# Altium PCB PCB1.pcbdoc
Units mil, origin at the board's own origin, x right, y up, seen from the top; angles counter-clockwise.
Board outline 3712 x 3149.61 mil, 2 copper layers (Top Layer, Bottom Layer); 12 components, 24 nets, 90 pads, 86 vias.
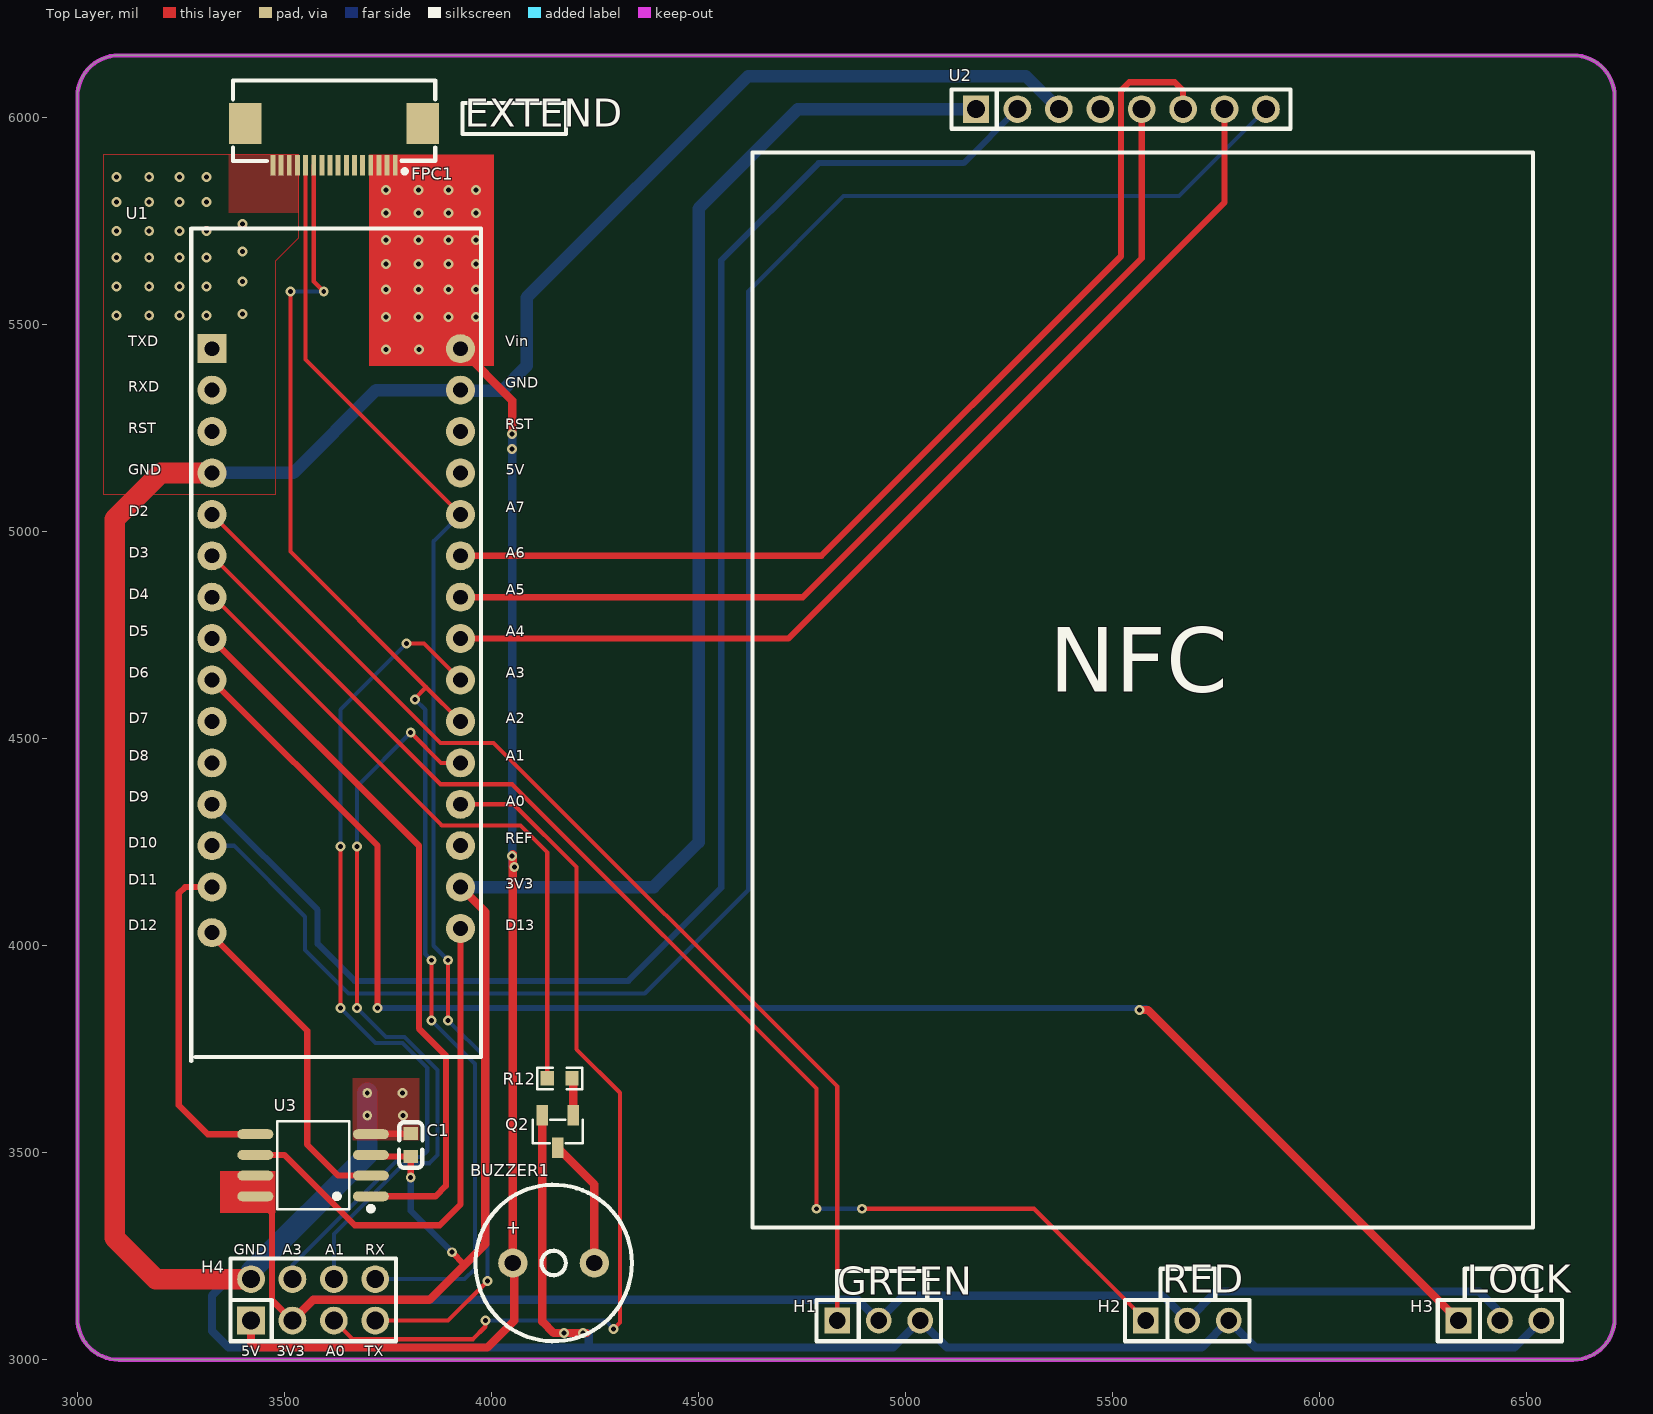
[diagram p0: Top Layer view]
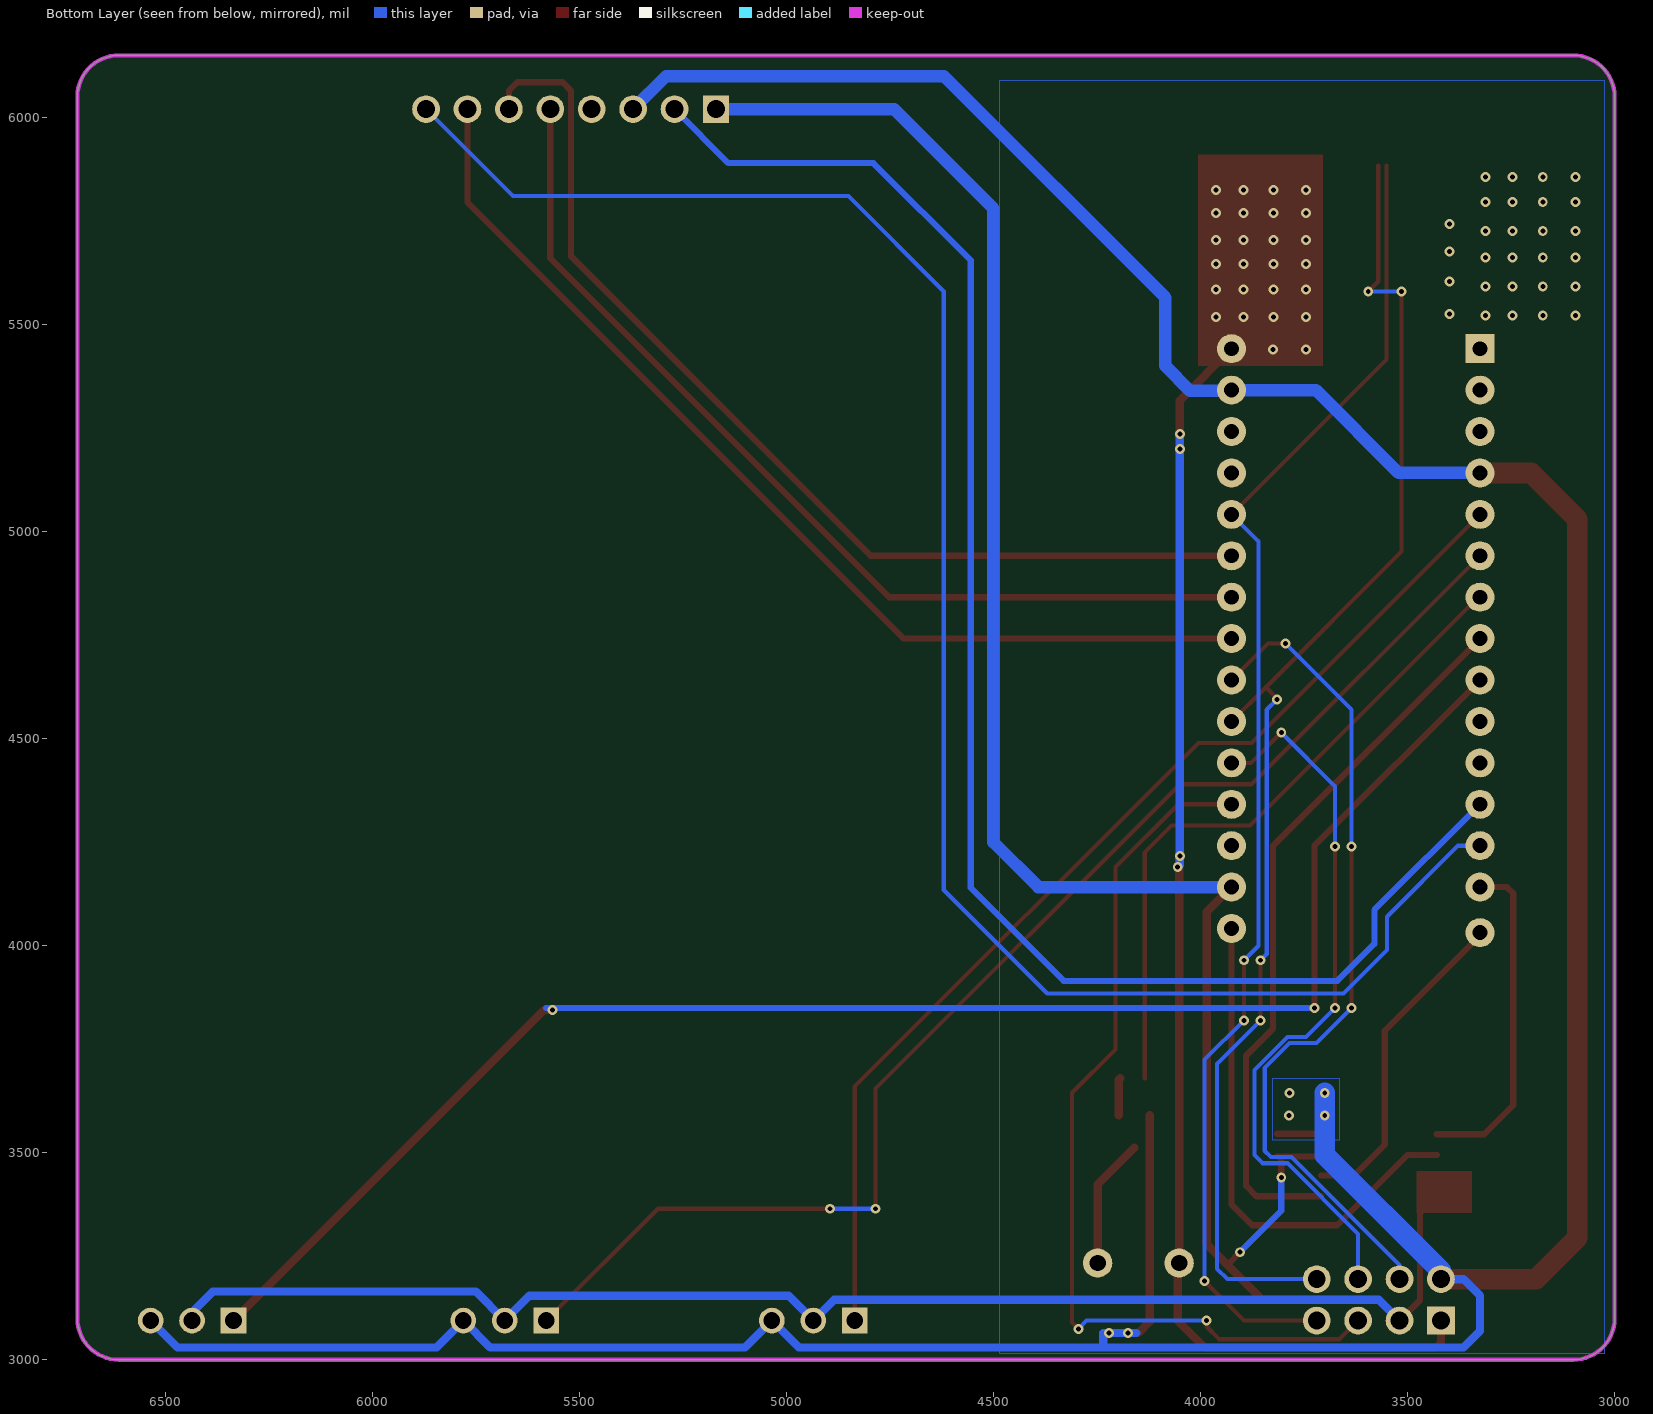
[diagram p1: Bottom Layer view, seen from below]

## Layer stack, top to bottom
Top Layer: signal copper (thickness not stored)
Dielectric: dielectric 12.6, FR-4, Dk 4.8
Bottom Layer: signal copper (thickness not stored)

## Board outline
3100,6149.61 6612,6149.61 cw(c6612,6049.61) 6712,6049.61 6712,3100 cw(c6612,3100) 6612,3000 3100,3000 cw(c3100,3100) 3000,3100 3000,6049.61 cw(c3100,6049.61)

## Components (designator, comment, footprint, x,y, rotation, side; value= is the part's Value field where it differs from the comment)
BUZZER1 "HNB09A05" BUZ-TH_BD9.6-P5.00-D0.7-FD 4150,3233.59 r0 top
C1 "CC0603KRX7R9BB104" C0603 3805,3518.23 r270 top
FPC1 "FPC-05F-16PH20" FPC-SMD_16P-P0.50_FPC-05F-16PH20 3620,5934.61 r180 top
H1 "PM254V-11-03-H85" HDR-TH_3P-P2.54-V-F 4935,3094.61 r0 top
H2 "PM254V-11-03-H85" HDR-TH_3P-P2.54-V-F 5680,3094.61 r0 top
H3 "PM254V-11-03-H85" HDR-TH_3P-P2.54-V-F 6435,3094.61 r0 top
H4 "PZ254V-12-8P" HDR-TH_8P-P2.54-V-M-R2-C4-S2.54 3569.39,3144.61 r0 top
Q2 "2N7002_C916396" SOT-23-3_L2.9-W1.3-P1.90-LS2.4-BR 4160,3551.06 r90 top
R12 "RC0603FR-071KL" R0603 4164.44,3679.61 r180 top
U1 "NUCLEO-L432KC" DIP-30_L51.0-W17.8-P2.54-LS15.2-TL 3625,4736.23 r0 top
U2 "PM254-1-08-Z-8.5" HDR-TH_8P-P2.54-V-F 5520,6019.61 r0 top
U3 "W25Q64JVSSIQ_C83140" SOP-8_L5.3-W5.3-P1.27-LS8.0-BL 3569.28,3469.61 r90 top

## Footprints (in the part's own frame and the unit in brackets; to place one, negate y for a bottom-side part, rotate by r counter-clockwise, add the part's x,y. Pads: shape width x height; smd on the part's side, far side on the other; paste and mask are expansions set on the pad)
BUZ-TH_BD9.6-P5.00-D0.7-FD [mm]
  round 1.8 hole 1: 1(-2.5,0) 2(2.5,0)
  silkscreen extent -4.8,-4.8 4.8,4.8
C0603 [mm]
  rect 0.8x0.9 smd: 1(-0.7,0) 2(0.7,0)
  silkscreen extent -1.41,-0.71 1.39,0.72
DIP-30_L51.0-W17.8-P2.54-LS15.2-TL [mil]
  rect 70x70 hole 36: 1(-300,705)
  round 70 hole 36: 2(-300,605) 3(-300,505) 4(-300,405) 5(-300,305) 6(-300,205) 7(-300,105) 8(-300,5) 9(-300,-95) 10(-300,-195) 11(-300,-295) 12(-300,-395) 13(-300,-495) 14(-300,-595) 15(-300,-705) 16(300,-695) 17(300,-595) 18(300,-495) 19(300,-395) 20(300,-295) 21(300,-195) 22(300,-95) 23(300,5) 24(300,105) 25(300,205) 26(300,305) 27(300,405) 28(300,505) 29(300,605) 30(300,705)
  silkscreen extent -350,-1015 350,995
FPC-SMD_16P-P0.50_FPC-05F-16PH20 [mm]
  rect 0.3x1.25 smd: 1(-3.75,1.288) 2(-3.25,1.288) 3(-2.75,1.288) 4(-2.25,1.288) 5(-1.75,1.288) 6(-1.25,1.288) 7(-0.75,1.288) 8(-0.25,1.288) 9(0.25,1.288) 10(0.75,1.288) 11(1.25,1.288) 12(1.75,1.288) 13(2.25,1.288) 14(2.75,1.288) 15(3.25,1.288) 16(3.75,1.288)
  rect 2x2.5 smd: 17(5.44,-1.288) 18(-5.44,-1.288)
  silkscreen extent -6.2,-3.91 6.2,1.78
HDR-TH_3P-P2.54-V-F [mil]
  rect 62x62 hole 40.16: 1(-100,0)
  round 62 hole 40.16: 2(0,0) 3(100,0)
  silkscreen extent -150,-50 150,50
HDR-TH_8P-P2.54-V-F [mm]
  rect 1.575x1.7 hole 1.1: 1(-8.89,0)
  round 1.7 hole 1.1: 2(-6.35,0) 3(-3.81,0) 4(-1.27,0) 5(1.27,0) 6(3.81,0) 7(6.35,0) 8(8.89,0)
  silkscreen extent -10.4,-1.2 10.4,1.2
HDR-TH_8P-P2.54-V-M-R2-C4-S2.54 [mm]
  rect 1.7x1.7 hole 1.1: 1(-3.81,-1.27)
  round 1.7 hole 1.1: 2(-3.81,1.27) 3(-1.27,-1.27) 4(-1.27,1.27) 5(1.27,-1.27) 6(1.27,1.27) 7(3.81,-1.27) 8(3.81,1.27)
  silkscreen extent -5.08,-2.54 5.08,2.54
R0603 [mil]
  rect 31.75x34.02 smd: 1(-29.66,0) 2(29.66,0)
  silkscreen extent -55,-26 55,26
SOP-8_L5.3-W5.3-P1.27-LS8.0-BL [mil]
  oval 23.98x86.79 smd: 1(-75,-139.46) 2(-25,-139.46) 3(25,-139.46) 4(75,-139.46) 5(75,139.46) 6(25,139.46) 7(-25,139.46) 8(-75,139.46)
  silkscreen extent -111,-145 106,87
SOT-23-3_L2.9-W1.3-P1.90-LS2.4-BR [mm]
  rect 1.25x0.7 smd: 1(1,-0.95) 2(1,0.95) 3(-1,0)
  silkscreen extent -0.73,-1.53 0.73,1.53

## Via types
v1: diameter 24.02, hole 12.01, Top Layer to Bottom Layer, 86 vias

## Nets (pads, with @x,y where several pads share a name; then routed paths per layer and width w, separated by ;. In a path a pad name is that pad's centre, name@x,y a point inside that pad or via, vN(x,y) a via of type N, cw(c..) or ccw(c..) an arc to the next point about the centre after c; other vN are vias at no path point)
3V3: C1.2 H1.2 H2.2 H3.2 H4.3 U1.17 U2.1 U3.3 U3.7 U3.8 | length 8185.2
  Top Layer w15: U3.8 3470,3354.43 3470,3144 H4.3 ; U3.3 3712.68,3490.67 C1.2 ; v1(3805,3439.61) C1.2 ; C1.2@3815,3490.67 C1.2 ; v1(3905,3259.61) 3933.51,3231.1 3933.51,3228.12
  Top Layer w20: H4.3 3569.39,3144.61 3850,3144.61 3933.51,3228.12 3985,3279.61 3985,4081.23 U1.17
  Bottom Layer w15: v1(3805,3439.61) 3805,3359.61 v1(3905,3259.61)
  Bottom Layer w20: H4.3 3569.39,3144.61 4885,3144.61 H1.2 4995,3154.61 5620,3154.61 H2.2 5750,3164.61 6385,3164.61 6435,3114.61 H3.2
  Bottom Layer w30: U1.17 4391.62,4141.23 4500,4249.61 4500,5779.61 4740,6019.61 U2.1
$1N1345: Q2.1 R12.1 | length 90.5
  Top Layer w20: R12.1 4197.4,3676.31 Q2.1
$1N1348: BUZZER1.2 Q2.3 | length 314.7
  Top Layer w20: Q2.3 4248.43,3423.26 BUZZER1.2
+5V: BUZZER1.1 FPC1.1 FPC1.2 FPC1.3 FPC1.4 H4.1 U1.30 | length 3154.8
  Top Layer w20: H4.1 3419.39,3040.22 3430,3029.61 3990,3029.61 4055,3094.61 4055,3230.16 BUZZER1.1 v1@4051.57,4221.19 ; U1.30 4050,5316.23 v1(4050,5235.42)
  Bottom Layer w20: v1(4050,5235.42) v1(4050,5199.61) v1(4050,4216.77) 4050,4194.61 v1(4055,4189.61)
  other v1: 3745,5439.61 3825.33,5439.61 3745,5518.22 3823.57,5518.22 3896.44,5518.22 3962.28,5518.22 3745,5584.06 3823.57,5584.06 3896.44,5584.06 3962.28,5584.06 3745,5645.52 3823.57,5645.52 3896.44,5645.52 3962.28,5645.52 3745,5703.46 3823.57,5703.46 3896.44,5703.46 3962.28,5703.46 3745,5768.42 3823.57,5768.42 3896.44,5768.42 3962.28,5768.42 3745,5824.61 3823.57,5824.61 3896.44,5824.61 3962.28,5824.61
A0: H4.5 U1.19 | length 2237.5
  Top Layer w10: H4.5 3664.39,3049.61 3955,3049.61 3985,3079.61 v1(3985,3094.61) ; U1.19 4053.38,4341.23 4205,4189.61 4205,3749.61 4310,3644.61 4310,3089.61 v1(4295,3074.61)
  Bottom Layer w10: v1(3985,3094.61) 4275,3094.61 v1(4295,3074.61)
A1: H4.6 U1.20 | length 1770.3
  Top Layer w10: v1(3675,3849.61) v1(3675,4239.61) ; v1(3805,4514.61) 3878.38,4441.23 U1.20
  Bottom Layer w10: H4.6 3619.39,3304 3790,3474.61 3850,3474.61 3870,3494.61 3870,3699.61 3790,3779.61 3745,3779.61 v1(3675,3849.61) ; v1(3675,4239.61) 3675,4384.61 v1(3805,4514.61)
A3: H4.4 U1.22 | length 2057.1
  Top Layer w10: v1(3635,3849.61) v1(3635,4239.61) ; v1(3795,4729.61) 3836.62,4729.61 U1.22
  Bottom Layer w10: H4.4 3519.39,3229 3780,3489.61 3830,3489.61 3845,3504.61 3845,3704.61 3785,3764.61 3720,3764.61 v1(3635,3849.61) ; v1(3635,4239.61) 3635,4569.61 v1(3795,4729.61)
BUZZ: R12.2 U1.7 | length 1610.3
  Top Layer w10: U1.7 3328.38,4841.23 3880,4289.61 4070,4289.61 4134.78,4224.83 R12.2
CS: U1.13 U2.8 | length 4470.4
  Bottom Layer w10: U1.13 3378.38,4241.23 3550,4069.61 3550,3989.61 3655,3884.61 4370,3884.61 4620,4134.61 4620,5579.61 4850,5809.61 5660,5809.61 U2.8
FLASH_CLK: U1.16 U3.6 | length 1252.9
  Top Layer w15: U3.6 3500,3494.61 3670,3324.61 3875,3324.61 3925,3374.61 U1.16
FLASH_CS: U1.8 U3.1 | length 1747.3
  Top Layer w15: U1.8 3825,4241.23 3825,3799.61 3890,3734.61 3890,3419.61 3865,3394.61 U3.1
FLASH_MISO: U1.15 U3.2 | length 791.7
  Top Layer w15: U1.15 3325,4024.61 3555,3794.61 3555,3519.61 3630,3444.61 U3.2
FLASH_MOSI: U1.14 U3.5 | length 811.6
  Top Layer w15: U1.14 3260,4141.23 3245,4126.23 3245,3614.61 3315,3544.61 U3.5
GND: C1.1 FPC1.13 FPC1.14 FPC1.15 FPC1.16 H1.3 H2.3 H3.3 H4.2 Q2.2 U1.4 U1.29 U2.3 U3.4 | length 9922.4
  Top Layer w15: U3.4 3709.91,3545.79 C1.1@3815,3545.79
  Top Layer w20: Q2.2 4122.6,3092.01 4150,3064.61 v1(4175.29,3064.61) v1@4230,3064.61
  Top Layer w50: U1.4 3201.62,5141.23 3090,5029.61 3090,3294.61 3190,3194.61 H4.2
  Bottom Layer w20: H4.2 3365,3194.61 3325,3154.61 3325,3069.61 3365,3029.61 4970,3029.61 H1.3 5100,3029.61 5715,3029.61 H2.3 5845,3029.61 6470,3029.61 H3.3 ; 4155,3064.61 v1(4175.29,3064.61) v1(4220.95,3064.61) 4235,3064.61 4235,3029.62
  Bottom Layer w30: U1.4 3521.62,5141.23 3721.62,5341.23 U1.29 3926.62,5339.61 4025,5339.61 4085,5399.61 4085,5564.61 4620,6099.61 5290,6099.61 U2.3
  Bottom Layer w50: H4.2 3419.39,3214 3700,3494.61 v1(3700,3589.61) v1(3700,3644.61)
  other v1: 3785.93,3589.61 3785.05,3644.61 3095,5520.95 3173.57,5520.95 3246.44,5520.95 3312.28,5520.95 3398.66,5524.61 3095,5590.95 3173.57,5590.95 3246.44,5590.95 3312.28,5590.95 3398.66,5603.18 3095,5660.95 3173.57,5660.95 3246.44,5660.95 3312.28,5660.95 3398.66,5676.05 3095,5725.95 3173.57,5725.95 3246.44,5725.95 3312.28,5725.95 3398.66,5741.89 3095,5795.95 3173.57,5795.95 3246.44,5795.95 3312.28,5795.95 3095,5855.95 3173.57,5855.95 3246.44,5855.95 3312.28,5855.95
LED_G: H1.1 U1.5 | length 2647.3
  Top Layer w10: U1.5 3876.62,4489.61 4005,4489.61 4835,3659.61 H1.1
LED_R: H2.1 U1.6 | length 3189.8
  Top Layer w10: U1.6 3876.62,4389.61 4050,4389.61 4785,3654.61 v1(4785,3364.61) ; v1(4895,3364.61) 5310,3364.61 H2.1
  Bottom Layer w10: v1(4785,3364.61) v1(4895,3364.61)
LOCK: H3.1 U1.9 | length 3893
  Top Layer w15: U1.9 3725,4241.23 v1(3725,3849.61)
  Top Layer w20: v1(5565,3844.61) 5585,3844.61 H3.1
  Bottom Layer w15: v1(3725,3849.61) 5580,3849.61
MISO: U1.24 U2.5 | length 2344
  Top Layer w15: U1.24 4751.62,4841.23 5570,5659.61 U2.5
MOSI: U1.25 U2.6 | length 2506.2
  Top Layer w15: U1.25 4796.62,4941.23 5520,5664.61 5520,6064.61 5540,6084.61 5650,6084.61 5670,6064.61 U2.6
RST: U1.12 U2.2 | length 3928.9
  Bottom Layer w15: U1.12 3580,4086.23 3580,4004.61 3670,3914.61 4330,3914.61 4555,4139.61 4555,5654.61 4790,5889.61 5140,5889.61 U2.2
SCK: U1.23 U2.7 | length 2506.3
  Top Layer w15: U1.23 4716.62,4741.23 5770,5794.61 U2.7
UART_RX: FPC1.11 H4.8 U1.21 | length 3329.2
  Top Layer w10: v1(3515,5579.61) 3515,4951.23 3842.34,4623.89 ; FPC1.11 3570.79,5603.82 v1(3595,5579.61) ; v1(3815,4594.61) 3815,4596.54 3842.34,4623.89 ; v1(3855,3819.61) v1(3855,3964.61) ; U1.21 3842.34,4623.89
  Bottom Layer w10: v1(3515,5579.61) v1(3595,5579.61) ; H4.8 3935,3194.61 3960,3219.61 3960,3714.61 v1(3855,3819.61) ; v1(3815,4594.61) 3840,4569.61 3840,3979.61 v1(3855,3964.61)
UART_TX: FPC1.12 H4.7 U1.26 | length 3239.9
  Top Layer w10: FPC1.12 3551.11,5415.12 U1.26 ; H4.7 3895,3094.61 v1(3990,3189.61) ; v1(3895,3819.61) v1(3895,3964.61)
  Bottom Layer w10: v1(3895,3819.61) 3990,3724.61 v1(3990,3189.61) ; v1(3895,3964.61) 3860,3999.61 3860,4976.23 U1.26
"": FPC1.5 FPC1.6 FPC1.7 FPC1.8 FPC1.9 FPC1.10 FPC1.17 FPC1.18 U1.1 U1.2 U1.3 U1.10 U1.11 U1.18 U1.27 U1.28 U2.4

## Polygon pours and split planes (outlines as drawn)
GND on Bottom Layer (solid, remove dead copper, pour order 1): 3665,3529.61 3825,3529.61 3825,3679.61 3665,3679.61
GND on Top Layer (solid, remove dead copper, pour order 2): 3025,3014.61 4485,3014.61 4485,6089.61 3025,6089.61
GND on Bottom Layer (solid, remove dead copper, pour order 3): 3025,3014.61 4485,3014.61 4485,6089.61 3025,6089.61
GND on Top Layer (solid, remove dead copper, pour order 0): 3062.29,5909.61 3062.29,5089.61 3478.52,5089.61 3478.52,5653.13 3535,5709.61 3535,5909.61

## Keep-outs
Board Outline Layer:
  the board outline again, w10

## Other copper
Top Layer:
  region net +5V: 3705,5399.61 4005,5399.61 4005,5909.61 3705,5909.61
  region net 3V3: 3345,3354.43 3478.45,3354.43 3478.45,3454.61 3345,3454.61

## Silkscreen, mask and mechanical layers (free items; w line width, h text height)
Top Silkscreen Layer:
  lines w10 net "": 3930,5959.61 4180,5959.61 4180,6034.61 3930,6034.61 3930,5959.61 ; 4630,3319.61 6515,3319.61 6515,5914.61 4630,5914.61 4630,3319.61 ; 4835,3144.61 5052.17,3144.61 5052.17,3214.61 4835,3214.61 4835,3144.61 ; 5615,3144.61 5747.62,3144.61 5747.62,3219.61 5615,3219.61 5615,3144.61 ; 6350,3144.61 6522.93,3144.61 6522.93,3219.61 6350,3219.61 6350,3144.61
  text "EXTEND" at 3935.59,5977.15 h67.97
  text "NFC" at 5346.7,4612.89 h155.76
  text "GND" at 3377.78,3253.49 h25.96
  text "A3" at 3495.55,3253.49 h25.96
  text "A1" at 3598.55,3253.49 h25.96
  text "RX" at 3695.56,3253.49 h25.96
  text "RED" at 5620.08,3162.15 h67.97
  text "LOCK" at 6355.25,3162.15 h67.97
  text "GREEN" at 4835.42,3157.15 h67.97
  text "5V" at 3396.19,3008.88 h25.96
  text "3V3" at 3481.09,3008.88 h25.96
  text "A0" at 3599.72,3008.88 h25.96
  text "TX" at 3693.92,3008.88 h25.96

## Text inside footprints (layer, text, board x,y; h text height)
BUZZER1: Top Silkscreen Layer "+" at 4034.65,3303.98 h32.69
U1: Top Silkscreen Layer "TXD" at 3122.78,5446.82 h25.96; Top Silkscreen Layer "GND" at 4032.78,5346.82 h25.96; Top Silkscreen Layer "5V" at 4033.92,5136.82 h25.96; Top Silkscreen Layer "D12" at 3122.78,4036.82 h25.96; Top Silkscreen Layer "Vin" at 4032.78,5446.82 h25.96; Top Silkscreen Layer "D13" at 4032.78,4036.82 h25.96; Top Silkscreen Layer "GND" at 3122.78,5136.82 h25.96; Top Silkscreen Layer "RXD" at 3122.78,5336.82 h25.96; Top Silkscreen Layer "RST" at 3122.78,5236.82 h25.96; Top Silkscreen Layer "D2" at 3123.92,5036.82 h25.96; Top Silkscreen Layer "D3" at 3123.92,4936.82 h25.96; Top Silkscreen Layer "D4" at 3123.92,4836.82 h25.96; Top Silkscreen Layer "D5" at 3123.92,4746.82 h25.96; Top Silkscreen Layer "D6" at 3123.92,4646.82 h25.96; Top Silkscreen Layer "D7" at 3123.92,4536.82 h25.96; Top Silkscreen Layer "D8" at 3123.92,4446.82 h25.96; Top Silkscreen Layer "D9" at 3123.92,4346.82 h25.96; Top Silkscreen Layer "D10" at 3122.78,4236.82 h25.96; Top Silkscreen Layer "D11" at 3122.78,4146.82 h25.96; Top Silkscreen Layer "3V3" at 4032.78,4136.82 h25.96; Top Silkscreen Layer "REF" at 4032.78,4246.82 h25.96; Top Silkscreen Layer "A0" at 4033.92,4336.82 h25.96; Top Silkscreen Layer "A1" at 4033.92,4446.82 h25.96; Top Silkscreen Layer "A2" at 4033.92,4536.82 h25.96; Top Silkscreen Layer "A3" at 4033.92,4646.82 h25.96; Top Silkscreen Layer "A4" at 4033.92,4746.82 h25.96; Top Silkscreen Layer "A5" at 4033.92,4846.82 h25.96; Top Silkscreen Layer "A6" at 4033.92,4936.82 h25.96; Top Silkscreen Layer "A7" at 4033.92,5046.82 h25.96; Top Silkscreen Layer "RST" at 4032.78,5246.82 h25.96